# EAGLE board Adapter-SOIC-28 (EAGLE 5.06)
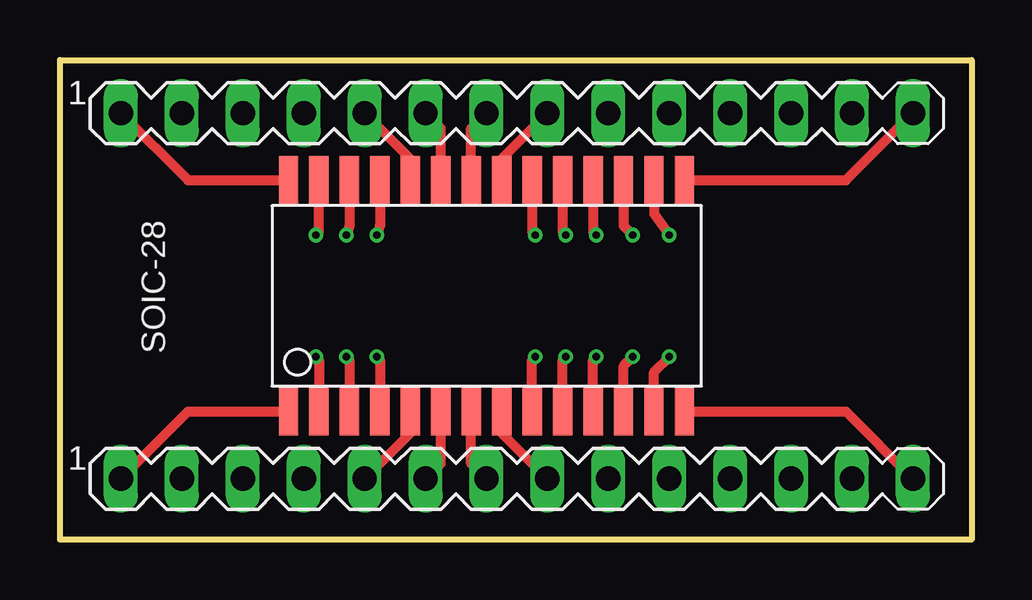
[diagram p0: board, top side]
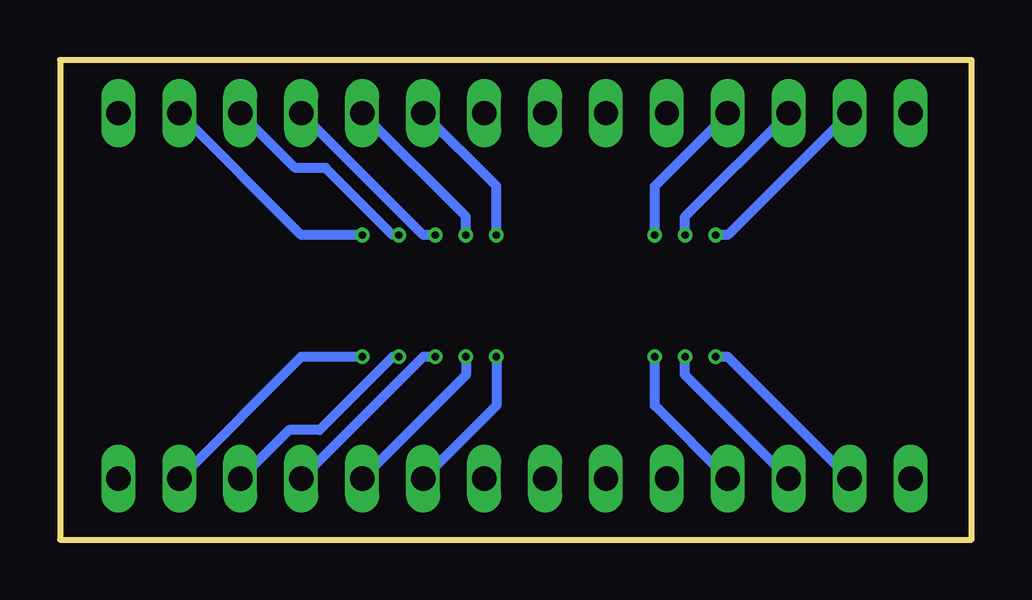
[diagram p1: board, bottom side, seen from below]

Size 38 x 20 mm. Coordinates in mm from the lower left corner, seen from the top.
Outline: 0,0 0,20 38,20 38,0 0,0
Copper layers (1*16): Top 0.035mm / dielectric 1.5mm / Bottom 0.035mm
Design rules "PCB-POOL": minimum track width 6mil, minimum drill 12mil, track to track 6mil, track to pad 6mil, pad to pad 6mil, via to via 6mil, smd to smd 6mil, copper to edge 20mil, drill to drill 8mil, minimum pad ring 8mil, minimum via ring 6mil, stop-mask expansion 3mil, vias tented up to drill 0mil, thermal gap 8mil

## Footprints (pad centres in the part's own frame; a part is rotated, then mirrored left to right if it is on the bottom)
SO-28L = smd 0.8 x 2: 1 -8.255,-4.826; 2 -6.985,-4.826; 3 -5.715,-4.826; 4 -4.445,-4.826; 5 -3.175,-4.826; 6 -1.905,-4.826; 7 -0.635,-4.826; 8 0.635,-4.826; 9 1.905,-4.826; 10 3.175,-4.826; 11 4.445,-4.826; 12 5.715,-4.826; 13 6.985,-4.826; 14 8.255,-4.826; 15 8.255,4.826; 16 6.985,4.826; 17 5.715,4.826; 18 4.445,4.826; 19 3.175,4.826; 20 1.905,4.826; 21 0.635,4.826; 22 -0.635,4.826; 23 -1.905,4.826; 24 -3.175,4.826; 25 -4.445,4.826; 26 -5.715,4.826; 27 -6.985,4.826; 28 -8.255,4.826
MA14-1 = drill 1.016 long: 1 -15.24,0; 2 -12.7,0; 3 -10.16,0; 4 -7.62,0; 5 -5.08,0; 6 -2.54,0; 7 0,0; 8 2.54,0; 9 5.08,0; 10 7.62,0; 11 10.16,0; 12 12.7,0; 13 15.24,0; 14 17.78,0

## Placement (x,y rotation side)
E$1  [SO-28L]  17.78,10.16 0 top
E$2  [MA14-1]  17.78,17.78 0 top
E$3  [MA14-1]  17.78,2.54 0 top

## Library data of the parts
E$1 = ref-packages
E$2 E$3 = turbod3

## Nets
S$1: E$1.28 E$2.1
S$2: E$1.27 E$2.2
S$3: E$1.26 E$2.3
S$4: E$1.25 E$2.4
S$5: E$1.24 E$2.5
S$6: E$1.23 E$2.6
S$7: E$1.22 E$2.7
S$8: E$1.21 E$2.8
S$9: E$1.20 E$2.9
S$10: E$1.19 E$2.10
S$11: E$1.18 E$2.11
S$12: E$1.17 E$2.12
S$13: E$1.16 E$2.13
S$14: E$1.15 E$2.14
S$15: E$1.1 E$3.1
S$16: E$1.2 E$3.2
S$17: E$1.3 E$3.3
S$18: E$1.4 E$3.4
S$19: E$1.5 E$3.5
S$20: E$1.6 E$3.6
S$21: E$1.7 E$3.7
S$22: E$1.8 E$3.8
S$23: E$1.9 E$3.9
S$24: E$1.10 E$3.10
S$25: E$1.11 E$3.11
S$26: E$1.12 E$3.12
S$27: E$1.13 E$3.13
S$28: E$1.14 E$3.14

## Tracks (layer width: path | path; a pad name or v marks a point on that pad's centre or on a via)
S$1
  Top 0.406: E$1.28 5.33,14.99 E$2.1
S$2  (via drill 0.3)
  Top 0.406: E$1.27 10.79,12.83 v10.67,12.7
  Bottom 0.406: v10.67,12.7 10.16,12.7 E$2.2
S$3  (via drill 0.3)
  Top 0.406: E$1.26 12.06,13.08 v11.94,12.7
  Bottom 0.406: v11.94,12.7 11.94,13.46 E$2.3
S$4  (via drill 0.3)
  Top 0.406: E$1.25 13.34,13.08 v13.21,12.7
  Bottom 0.406: v13.21,12.7 13.21,14.73 E$2.4
S$5
  Top 0.406: E$1.24 14.61,15.88 E$2.5
S$6
  Top 0.406: E$1.23 15.88,17.14 E$2.6
S$7
  Top 0.406: E$1.22 17.14,17.14 E$2.7
S$8
  Top 0.406: E$1.21 18.41,15.88 E$2.8
S$9  (via drill 0.3)
  Top 0.406: E$1.20 19.68,12.83 v19.81,12.7
  Bottom 0.406: v19.81,12.7 19.81,14.73 E$2.9
S$10  (via drill 0.3)
  Top 0.406: E$1.19 20.95,12.83 v21.08,12.7
  Bottom 0.406: v21.08,12.7 21.08,13.46 E$2.10
S$11  (via drill 0.3)
  Top 0.406: E$1.18 22.23,12.83 v22.35,12.7
  Bottom 0.406: v22.35,12.7 22.86,12.7 E$2.11
S$12  (via drill 0.3)
  Top 0.406: E$1.17 23.5,13.08 v23.88,12.7
  Bottom 0.406: v23.88,12.7 24.13,12.7 26.92,15.49 28.19,15.49 E$2.12
S$13  (via drill 0.3)
  Top 0.406: E$1.16 24.77,13.59 v25.4,12.7
  Bottom 0.406: v25.4,12.7 27.94,12.7 E$2.13
S$14
  Top 0.406: E$1.15 32.77,14.99 E$2.14
S$15
  Top 0.406: E$1.1 5.33,5.33 E$3.1
S$16  (via drill 0.3)
  Top 0.406: E$1.2 10.79,7.49 v10.67,7.62
  Bottom 0.406: v10.67,7.62 10.16,7.62 E$3.2
S$17  (via drill 0.3)
  Top 0.406: E$1.3 12.06,7.49 v11.94,7.62
  Bottom 0.406: v11.94,7.62 11.94,6.86 E$3.3
S$18  (via drill 0.3)
  Top 0.406: E$1.4 13.34,7.49 v13.21,7.62
  Bottom 0.406: v13.21,7.62 13.21,5.59 E$3.4
S$19
  Top 0.406: E$1.5 14.61,4.45 E$3.5
S$20
  Top 0.406: E$1.6 15.88,3.17 E$3.6
S$21
  Top 0.406: E$1.7 17.14,3.17 E$3.7
S$22
  Top 0.406: E$1.8 18.41,4.45 E$3.8
S$23  (via drill 0.3)
  Top 0.406: E$1.9 19.68,7.49 v19.81,7.62
  Bottom 0.406: v19.81,7.62 19.81,5.59 E$3.9
S$24  (via drill 0.3)
  Top 0.406: E$1.10 20.95,7.49 v21.08,7.62
  Bottom 0.406: v21.08,7.62 21.08,6.86 E$3.10
S$25  (via drill 0.3)
  Top 0.406: E$1.11 22.23,7.49 v22.35,7.62
  Bottom 0.406: v22.35,7.62 22.86,7.62 E$3.11
S$26  (via drill 0.3)
  Top 0.406: E$1.12 23.5,7.24 v23.88,7.62
  Bottom 0.406: v23.88,7.62 24.13,7.62 27.18,4.57 28.45,4.57 E$3.12
S$27  (via drill 0.3)
  Top 0.406: E$1.13 24.77,6.99 v25.4,7.62
  Bottom 0.406: v25.4,7.62 27.94,7.62 E$3.13
S$28
  Top 0.406: E$1.14 32.77,5.33 E$3.14

## Text on the board
tNames: SOIC-28